# Altium PCB bt-fpc-evt1.PcbDoc
Units mm, origin at the board's own origin, x right, y up, seen from the top; angles counter-clockwise.
Board outline 77.03 x 73.13 mm, 2 copper layers (Top Layer, Bottom Layer), stack 0.109 mm thick; 24 components, 31 nets, 316 pads, 37 vias.
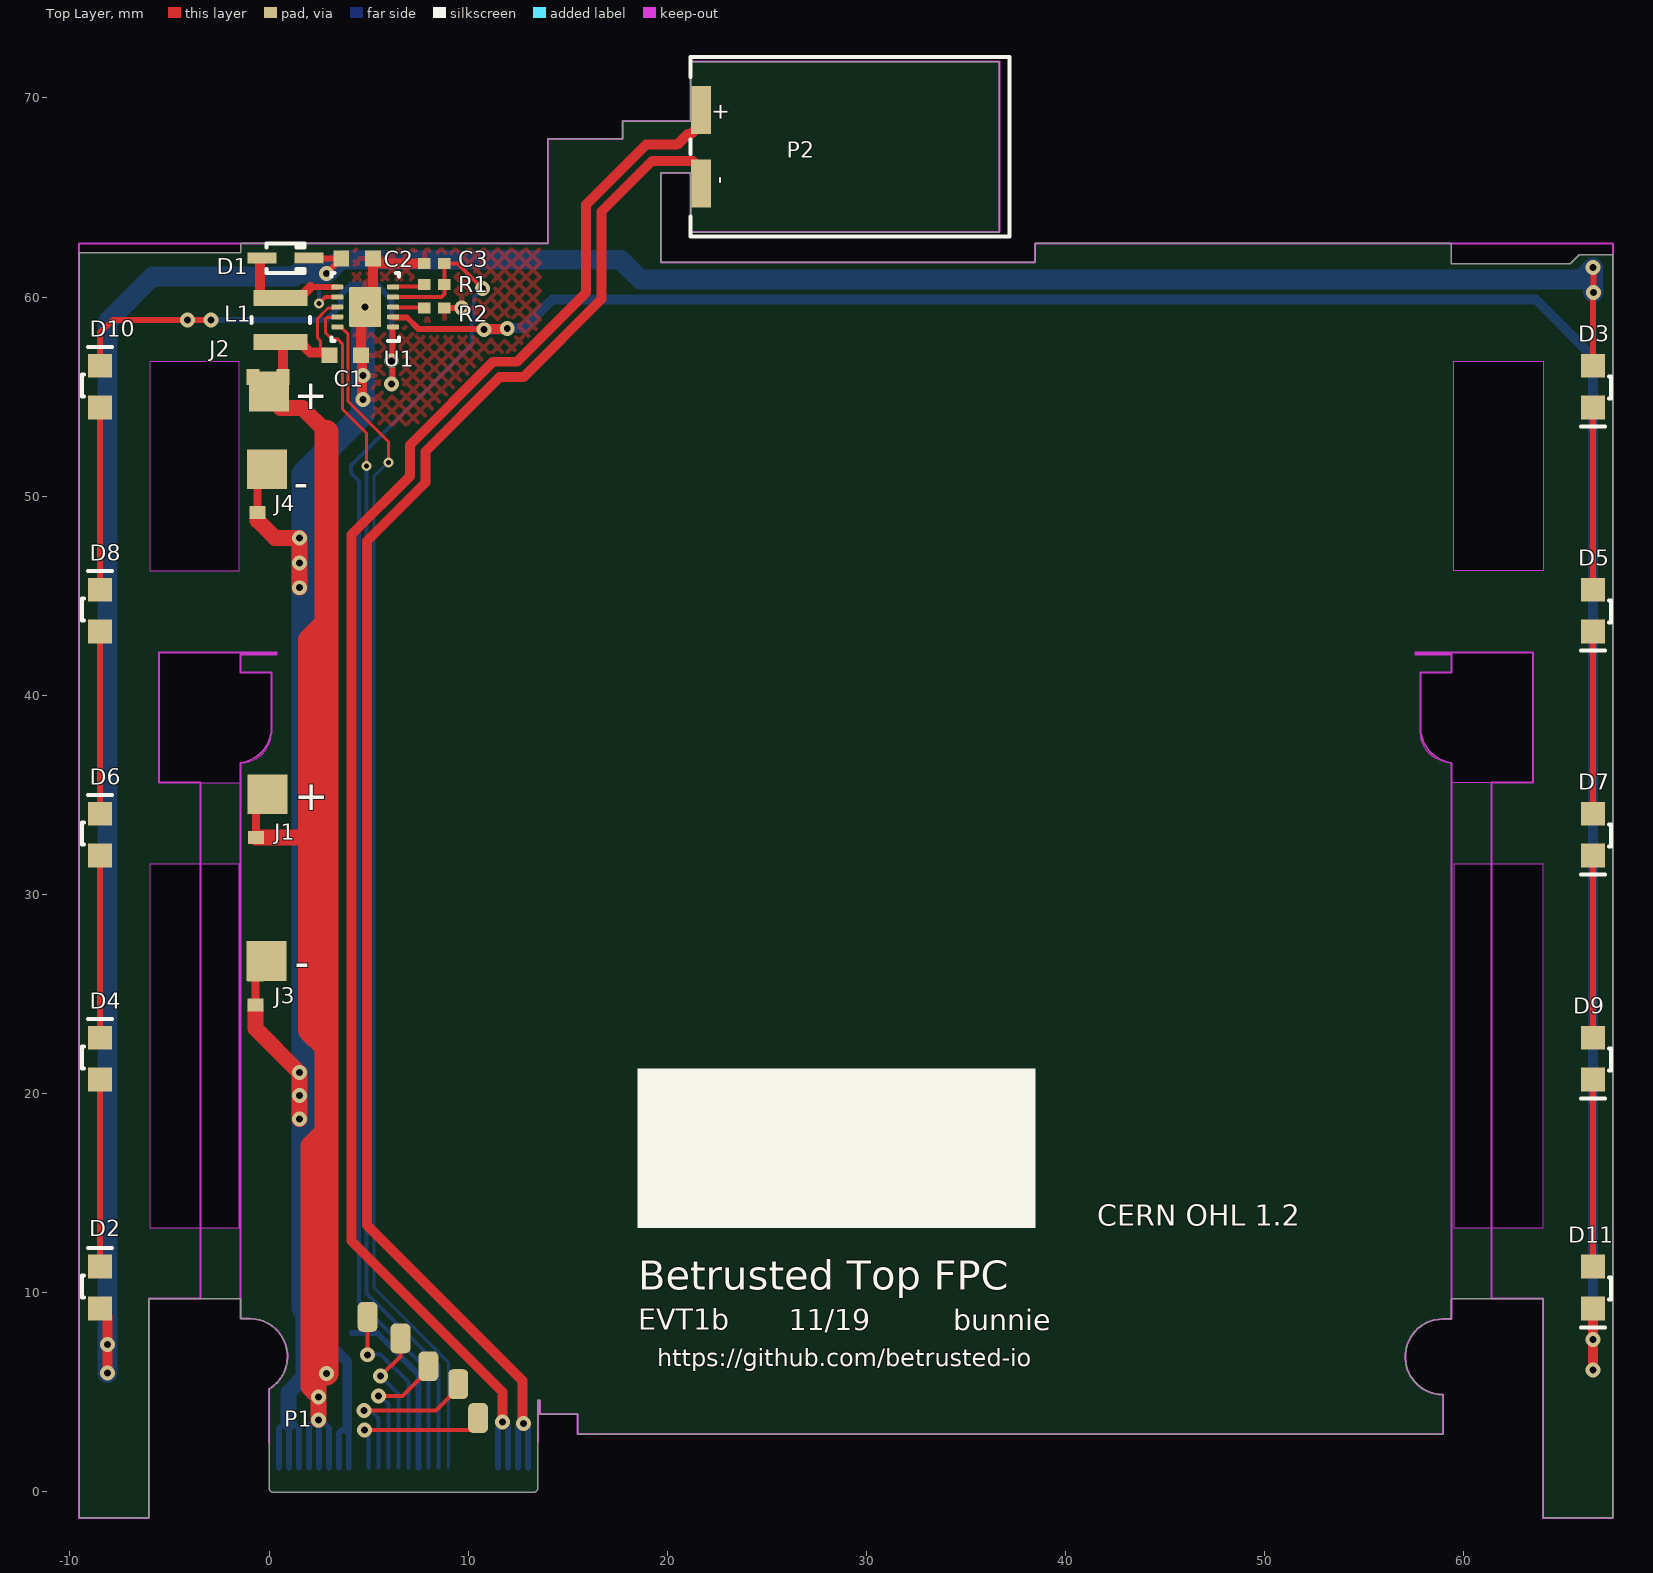
[diagram p0: Top Layer view]
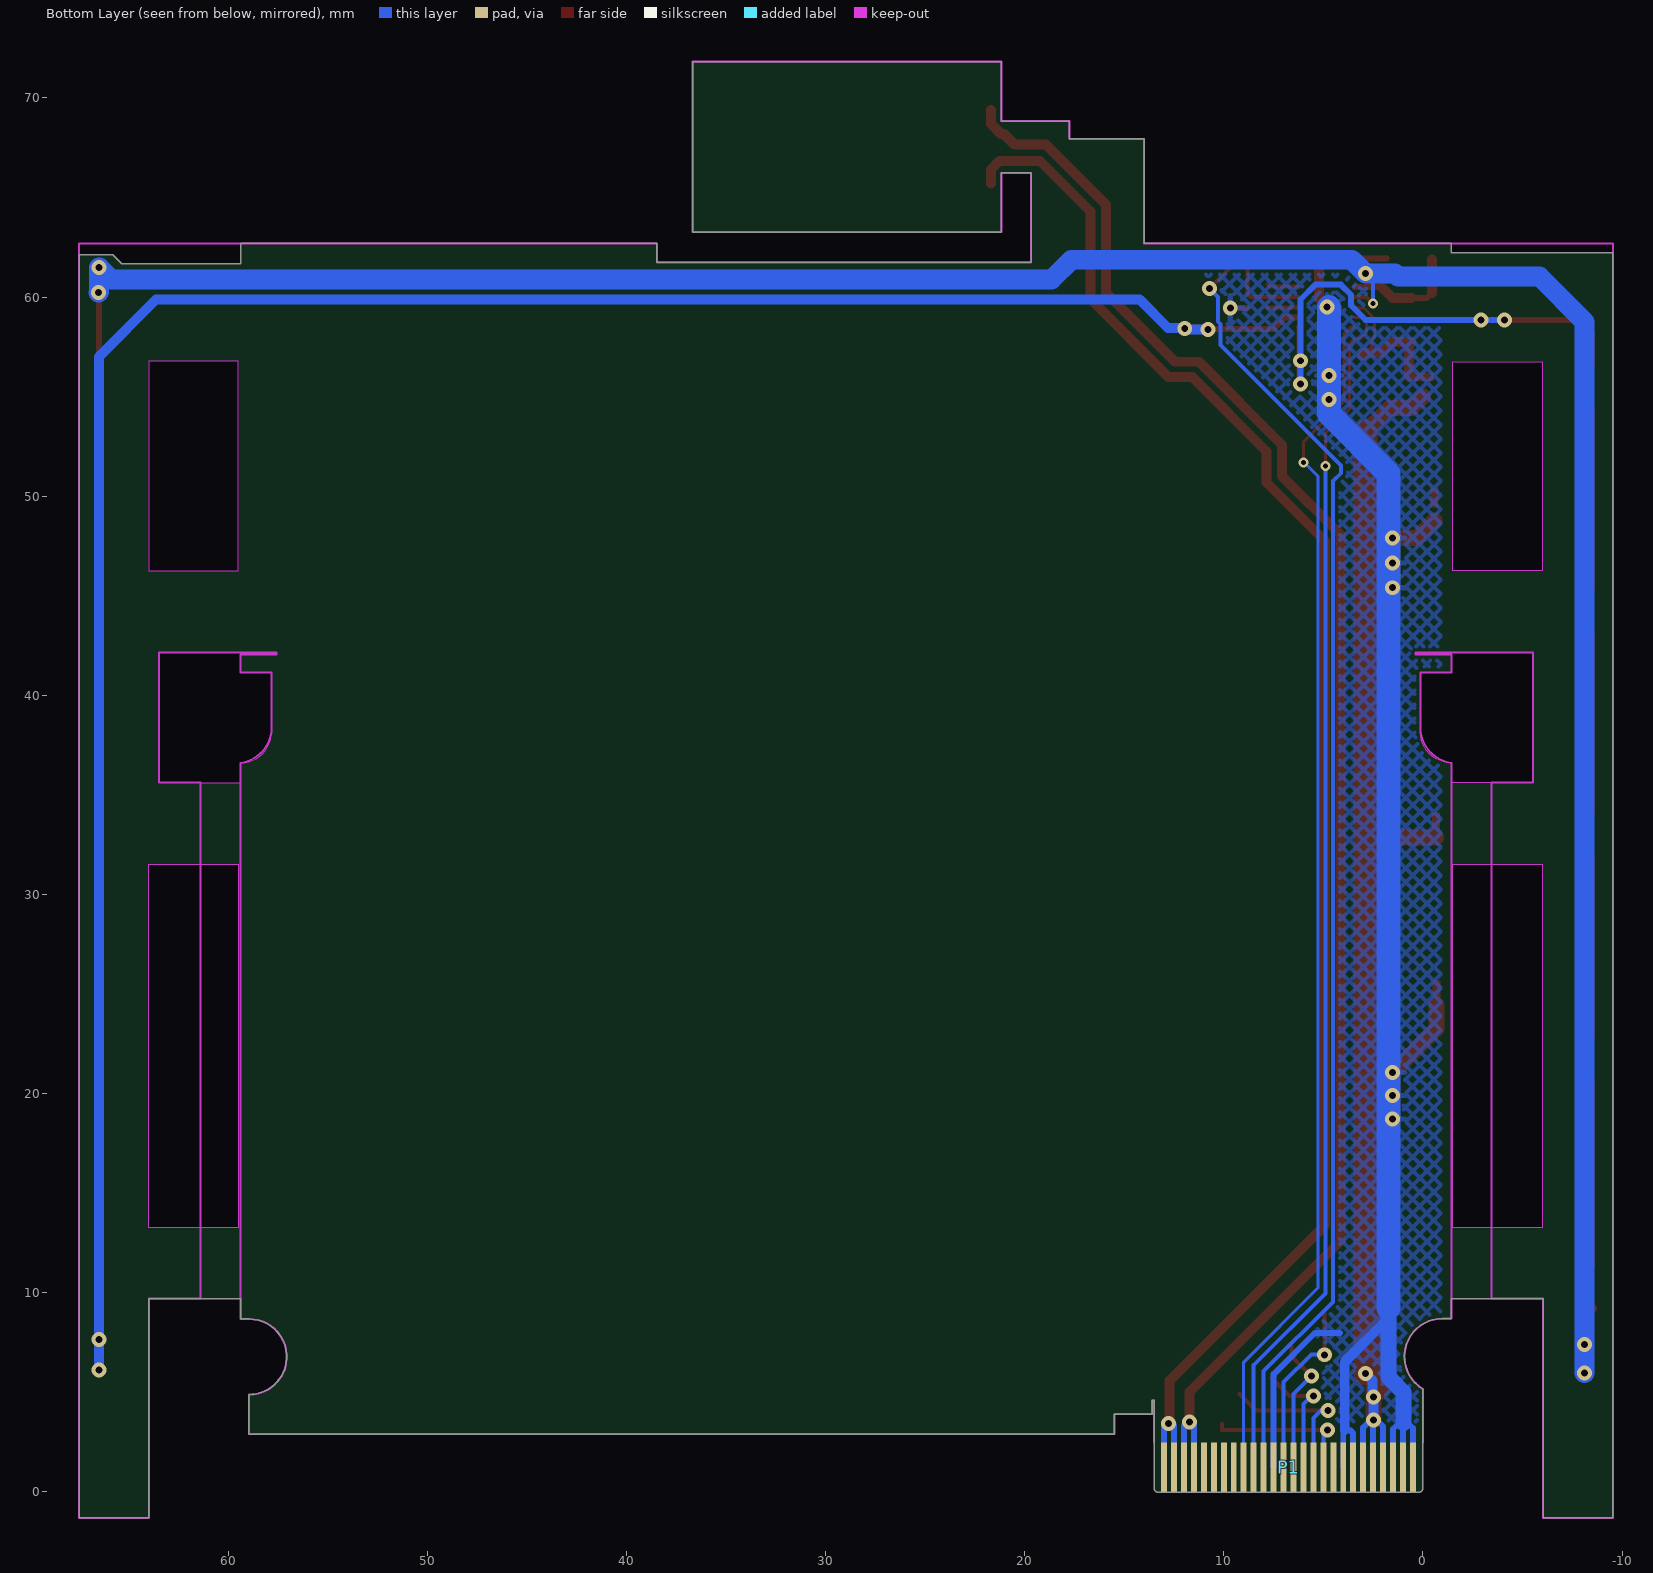
[diagram p1: Bottom Layer view, seen from below]

## Layer stack, top to bottom
Top Coverlay: solder mask 0.0125, FC-001, Dk 4
Top Layer: signal copper 0.02
Dielectric 2: prepreg 0.028, Composite dielectric, Dk 3.952
Dielectric 1: prepreg 0.0125, Composite dielectric, Dk 3.952
Dielectric 3: prepreg 0.028, Composite dielectric, Dk 3.952
Bottom Layer: signal copper 0.02
Bottom Coverlay: solder mask 0.0125, FC-001, Dk 4

## Board outline
-6.042,-1.312 -6.042,9.69 -1.425,9.69 -1.425,8.69 -0.975,8.69 cw(c-0.975,6.79) 0,5.159 0,2.475 0,0.175 ccw(c0.2,0.175) 0.2,-0.025 13.3,-0.025 ccw(c13.3,0.175) 13.5,0.175 13.5,2.475 13.5,4.584 13.6,4.584 13.6,3.89 15.5,3.89 15.5,2.89 58.962,2.89 58.962,4.873 cw(c58.963,6.773) 58.964,8.673 59.375,8.673 59.375,9.69 63.992,9.69 63.992,-1.312 67.492,-1.312 67.492,62.127 65.802,62.127 65.8,62.125 65.35,61.675 59.375,61.675 59.375,62.69 38.475,62.69 38.475,61.74 19.675,61.74 19.675,66.24 21.175,66.24 21.175,63.26 36.675,63.26 36.675,71.82 21.175,71.82 21.175,68.84 17.75,68.84 17.75,67.94 14,67.94 14,62.69 -1.425,62.69 -1.425,62.225 -9.542,62.225 -9.542,-1.312
cut-out: 0.375,42.14 -5.542,42.14 -5.542,35.607 -1.425,35.607 -1.425,36.607 ccw(c-1.425,38.157) 0.125,38.157 0.125,41.14 -1.425,41.14 -1.425,42.04 0.375,42.04
cut-out: 57.575,42.14 63.492,42.14 63.492,35.607 59.375,35.607 59.375,36.607 cw(c59.375,38.157) 57.825,38.157 57.825,41.14 59.375,41.14 59.375,42.04 57.575,42.04
cut-out: 59.5,56.775 64,56.775 64,46.25 59.5,46.25
cut-out: 59.5,13.25 64,13.25 64,31.5 59.5,31.5
cut-out: -6,13.25 -1.5,13.25 -1.5,31.5 -6,31.5
cut-out: -6,56.75 -6,46.25 -1.5,46.25 -1.5,56.75

## Design rules (kind name [scope] priority, off if disabled: settings)
Clearance [All] p1: gap=0.15 ignorepadtopadclearanceinfootprint=FALSE except(0: Arc-Hole Track-Hole SMDPad-Hole THPad-Hole Via-Hole Fill-Hole Poly-Hole Region-Hole Text-Hole)
MinimumSolderMaskSliver [All] p1 off: minsoldermaskwidth=0.254
PolygonConnect [All] p1: connectstyle=Relief reliefconductorwidth=0.254 reliefentries=4 polygonreliefangle="90 Angle" airgapwidth=0.254
RoomDefinition fpc [InComponentClass('fpc')] p1 off: confinementstyle=ConfineIn formatcopy=TRUE lockcomponents=FALSE outline 68.723,0.204 68.125,0.204 68.125,17.73 68.723,17.73
RoutingVias [All] p1: holewidth=0.35 width=0.8 viastyle="Through Hole" minholewidth=0.25 minwidth=0.5 maxholewidth=0.7 maxwidth=1
SilkToSilkClearance [All] p1 off: silktosilkclearance=0.254
SilkToSolderMaskClearance [IsPad] p1 off: minsilkscreentomaskgap=0.254 clearancetoexposedcopper=TRUE
SolderMaskExpansion [All] p1: expansion=0.102
Width [All] p1: maxlimit=5 minlimit=0.15 preferedwidth=0.15
27 further rules are at their usual default settings.

## Components (designator, comment, footprint, x,y, rotation, side; value= is the part's Value field where it differs from the comment)
C1 "2.2uF, 25V, X5R" B_CAP0603 3.825,57.075 r0 top
C2 "2.2uF, 25V, X5R" B_CAP0603 4.425,61.925 r0 top
C3 "0.1uF, 10V, X5R" B_CAP0402 8.3,61.675 r180 top
D1 "NSR0530HT1G" SOD-323 0.825,61.95 r0 top
D2 "white SML-R1" ROHM_SML-R1 -8.5,10.25 r0 top
D3 "white SML-R1" ROHM_SML-R1 66.5,55.5 r180 top
D4 "white SML-R1" ROHM_SML-R1 -8.5,21.75 r0 top
D5 "white SML-R1" ROHM_SML-R1 66.5,44.25 r180 top
D6 "white SML-R1" ROHM_SML-R1 -8.5,33 r0 top
D7 "white SML-R1" ROHM_SML-R1 66.5,33 r180 top
D8 "white SML-R1" ROHM_SML-R1 -8.5,44.25 r0 top
D9 "white SML-R1" ROHM_SML-R1 66.5,21.75 r180 top
D10 "white SML-R1" ROHM_SML-R1 -8.5,55.5 r0 top
D11 "white SML-R1" ROHM_SML-R1 66.5,10.25 r180 top
J1 "power tap (DNP)" RESTAP-0603 -0.65,33.6 r90 top
J2 "power tap (DNP)" RESTAP-0603 -0.05,55.975 r180 top
J3 "power tap (DNP)" RESTAP-0603 -0.675,25.2 r90 top
J4 "power tap (DNP)" RESTAP-0603 -0.575,49.937 r270 top
L1 "10uH 0.81A 3030" B_IND3030_MUR 0.575,58.85 r90 top
P1 "26-pin FPC" HRS_FH34SRJ-26S-FPC 6.75,1.225 r0 top
P2 "CMS-16093-076SP-67" CUI_CMS-16093-076SP-67 21.7,67.55 r270 top
R1 "47k, 1%" B_RES0402 8.3,60.625 r180 top
R2 "47k, 1%" B_RES0402 8.3,59.45 r0 top
U1 "LM3509SDE/NOPB" DSC0010A_V 4.825,59.5 r180 top

## Footprints (in the part's own frame and the unit in brackets; to place one, negate y for a bottom-side part, rotate by r counter-clockwise, add the part's x,y. Pads: shape width x height; smd on the part's side, far side on the other; paste and mask are expansions set on the pad)
B_CAP0402 [mm] "Capacitor 0402"
  rect 0.63x0.55 smd mask+0.07: 1(-0.5,0) 2(0.5,0)
  body extent -0.53,-0.27 0.53,0.28, height 0.4
B_CAP0603 [mm] "Capacitor 0603"
  rect 0.8x0.8 smd mask+0.07: 1(-0.8,0) 2(0.8,0)
  body extent -0.85,-0.45 0.85,0.45, height 0.9
B_IND3030_MUR [mm] "Chip Inductor, 2-Leads, Body 3.00x3.00mm, IPC Medium Density"
  rect 0.8x2.7 smd: 1(-1.1,0) 2(1.1,0)
  silkscreen extent -0.15,-1.47 0.15,1.47, body extent -1.5,-1.5 1.5,1.5, height 1.1
B_RES0402 [mm] "Resistor 0402"
  rect 0.63x0.55 smd mask+0.07: 1(-0.5,0) 2(0.5,0)
  body extent -0.53,-0.28 0.53,0.28, height 0.4
CUI_CMS-16093-076SP-67 [mm] "CUI IP67 rated speaker"
  rect 2.4x1 smd mask+0.1: 1(1.85,0) 2(-1.85,0)
  silkscreen extent -4.5,-0.53 4.5,15.48, body extent -4.5,-0.52 4.5,15.48, height 3.1
DSC0010A_V [mm] "SON, 10-Leads, Body 3x3mm, Pitch 0.5mm, Thermal Pad 2.0x1.6mm, TI Recommended"
  rrect40% 0.6x0.25 smd mask+0.05: 1(-1.4,1) 2(-1.4,0.5) 3(-1.4,0) 4(-1.4,-0.5) 5(-1.4,-1) 6(1.4,-1) 7(1.4,-0.5) 8(1.4,0) 9(1.4,0.5) 10(1.4,1)
  rrect6% 1.6x2 smd paste-0.825 mask+0.05: 11(0,0)
  silkscreen extent -1.7,-1.7 1.7,1.7, body extent -1.55,-1.55 1.55,1.55, height 0.8
HRS_FH34SRJ-26S-FPC [mm] "FPC pattern for mating to FH34SRJ-26S"
  rect 0.3x2.5 smd far side mask+0.07: 1(-6.25,0) 2(-5.75,0) 3(-5.25,0) 4(-4.75,0) 5(-4.25,0) 6(-3.75,0) 7(-3.25,0) 8(-2.75,0) 9(-2.25,0) 10(-1.75,0) 11(-1.25,0) 12(-0.75,0) 13(-0.25,0) 14(0.25,0) 15(0.75,0) 16(1.25,0) 17(1.75,0) 18(2.25,0) 19(2.75,0) 20(3.25,0) 21(3.75,0) 22(4.25,0) 23(4.75,0) 24(5.25,0) 25(5.75,0) 26(6.25,0)
RESTAP-0603 [mm] "0603 Power tap, cut-trace style"
  rect 0.65x0.8 smd: 1(-0.75,0) 1(0.75,0)
  Top Layer region: -0.5,-0.2 0.5,-0.2 0.5,0.2 -0.5,0.2
  body extent -0.8,-0.4 0.8,0.4, height 0.8
ROHM_SML-R1 [mm] "PICOLED-side firing, 0.2mm thick"
  rect 1.2x1.2 smd mask+0.07: 1(0,-1.05) 2(0,1.05)
  silkscreen extent -0.9,-0.5 0.6,2, body extent -0.75,-0.8 0.35,0.8, height 0.2
SOD-323 [mm] "SOD-323/SC-76; 2 Leads; Body 1.7 x 1.3 mm, (LxW)"
  rect 1.45x0.55 smd: 1(1.175,0) 2(-1.175,0)
  silkscreen extent -0.95,-0.75 0.95,0.75

## Part data
C1 C2: library part "Cap Semi", "Capacitor (Semiconductor SIM Model)", MPN=GRM188R61E225MA12D, MYPN=C-225-25-X5R-0603, VENDOR=Murata
C3: library part "Cap Semi", "Capacitor (Semiconductor SIM Model)", MPN=CL05A104KP5NNNC, MYPN=C-104-10-X5R-0402, VENDOR=Samsung
D1: library part "Diode 11DQ03", "Schottky Rectifier", ComponentLink1Description="Manufacturer Link", ComponentLink1URL=http://www.irf.com/, ComponentLink2Description=Datasheet, ComponentLink2URL=http://www.irf.com/product-info/datasheets/data/11dq03.pdf, MPN=NSR0530HT1G, MYPN=D-NSR0530HT1G, VENDOR="On Semi"
D2 D3 D4 D5 D6 D7 D8 D9 D10 D11: library part LED2, "Red LED", MPN=SMLR13WBDW, LatestRevisionDate=17-Jul-2002, LatestRevisionNote="Re-released for DXP Platform.", MYPN=D-LED-WHT-SIDE-0.2mm, PackageReference=3.2X1.6X1.1, PackageVersion=Feb-2002, Published=8-Jun-2000, Publisher="Altium Limited", VENDOR=ROHM
J1 J2 J3 J4: library part CON1, "Connector", MPN=DNP, MYPN=J-TP-PWRTAP-0603, VENDOR=DNP
L1: library part "Inductor Iron", "Magnetic-Core Inductor", MPN=LQH3NPN100MJRL, MYPN=L-LQH3NPN100MJRL, VENDOR=Murata
P1: library part FPC-26, "26 Pin FPC footprint", MPN=DNP, MYPN=DNP, System=Connector, VENDOR="FPC pattern"
P2: library part "Header 2", LatestRevisionDate=17-Jul-2002, LatestRevisionNote="Re-released for DXP Platform.", MPN=CMS-16093-076SP-67, MYPN=SPK-CMS-16093-076SP-67, Publisher="Altium Limited", VENDOR=CUI
R1 R2: library part Res1, "Resistor", MPN=ANY, MYPN=R-473-1P-1_16W-0402, VENDOR=ANY
U1: MPN=LM3509SDE/NOPB, MYPN=U-LM3509SDE/NOPB, VENDOR=TI

## Free pads (board coordinates)
  rrect50% 1x1.5 smd mask+0.07: 0(4.95,8.78) 0(6.6,7.7) 0(8,6.3) 0(9.5,5.4) 0(10.5,3.7)
  rect 2.54x0.051 on Top Overlay: 1(44.339,17.76) 1(44.339,17.811) 1(44.339,17.861) 1(44.339,17.912) 1(44.339,17.963) 1(44.339,18.014) 1(44.339,18.065) 1(44.339,18.115) 1(44.339,18.166) 1(44.339,18.217) 1(44.339,18.268) 1(44.339,18.319) 1(44.441,18.522) 1(48.759,18.522) 1(48.861,17.76) 1(48.861,18.166) 1(48.861,18.319) 1(48.861,17.709) 1(48.861,17.811) 1(48.861,17.861) 1(48.861,17.912) 1(48.861,18.115) 1(48.861,18.217) 1(48.861,18.268)
  rect 2.591x0.051 on Top Overlay: 1(44.365,17.607) 1(44.365,18.369) 1(44.365,17.658) 1(44.365,17.709) 1(44.365,18.42) 1(44.416,17.557) 1(48.784,17.557) 1(48.835,17.607) 1(48.835,17.658) 1(48.835,18.369) 1(48.835,18.42) 1(48.835,18.471)
  rect 2.642x0.051 on Top Overlay: 1(44.39,18.471)
  rect 0.102x0.051 on Top Overlay: 1(44.441,20.808) 1(45.508,15.575) 1(47.692,15.575) 1(48.759,20.808)
  rect 0.152x0.051 on Top Overlay: 1(44.466,15.271) 1(48.734,15.271)
  rect 0.254x0.051 on Top Overlay: 1(44.466,15.321) 1(44.466,20.757) 1(45.482,15.626) 1(47.718,15.626) 1(48.734,15.321) 1(48.734,20.757)
  rect 0.356x0.051 on Top Overlay: 1(44.466,20.706) 1(45.432,15.677) 1(47.768,15.677) 1(48.734,20.706) 1(48.734,15.372)
  rect 0.406x0.051 on Top Overlay: 1(44.492,15.372)
  rect 0.508x0.051 on Top Overlay: 1(44.492,15.423) 1(44.492,20.655) 1(48.708,15.423)
  rect 0.61x0.051 on Top Overlay: 1(44.492,20.605) 1(48.708,15.474) 1(48.708,20.605)
  rect 0.66x0.051 on Top Overlay: 1(44.517,15.474)
  rect 0.762x0.051 on Top Overlay: 1(44.517,15.525) 1(44.517,20.554) 1(48.683,15.525)
  rect 0.864x0.051 on Top Overlay: 1(44.517,15.575) 1(44.517,20.503) 1(46.6,21.57) 1(48.683,15.575) 1(48.683,20.503)
  rect 0.965x0.051 on Top Overlay: 1(44.517,20.452) 1(46.6,21.519) 1(46.6,21.417) 1(46.6,21.468) 1(48.683,20.452)
  rect 1.118x0.051 on Top Overlay: 1(44.543,15.677) 1(44.543,20.401) 1(46.625,21.062) 1(48.657,15.677) 1(48.657,20.401)
  rect 1.219x0.051 on Top Overlay: 1(44.543,20.351) 1(46.625,20.808) 1(48.657,20.351)
  rect 1.016x0.051 on Top Overlay: 1(44.543,15.626) 1(46.625,21.367) 1(48.657,15.626)
  rect 2.337x0.051 on Top Overlay: 1(44.543,17.506) 1(47.895,19.03) 1(48.657,17.506)
  rect 2.286x0.051 on Top Overlay: 1(44.619,18.573) 1(45.33,19.03) 1(48.632,18.573)
  rect 2.134x0.051 on Top Overlay: 1(44.695,17.455) 1(45.203,18.979) 1(47.997,18.979) 1(48.505,17.455)
  rect 1.93x0.051 on Top Overlay: 1(44.746,15.88) 1(45,17.252) 1(45.051,17.201) 1(45.051,18.877) 1(45.152,16.896) 1(45.152,16.947) 1(48.048,16.896) 1(48.048,16.947) 1(48.149,17.201) 1(48.149,18.877) 1(48.454,15.88)
  rect 1.829x0.051 on Top Overlay: 1(44.746,15.829) 1(44.847,16.083) 1(44.898,16.134) 1(44.898,16.185) 1(44.898,18.674) 1(44.949,16.236) 1(44.949,17.303) 1(44.949,17.353) 1(44.949,18.725) 1(45,18.776) 1(45.152,16.744) 1(45.152,16.795) 1(48.048,16.744) 1(48.048,16.795) 1(48.251,17.303) 1(48.251,18.725) 1(48.302,16.185) 1(48.302,17.353) 1(48.302,18.674) 1(48.353,16.083) 1(48.454,15.829)
  rect 2.032x0.051 on Top Overlay: 1(44.746,18.623) 1(45.152,16.998) 1(45.152,17.049) 1(45.152,17.099) 1(48.048,16.998) 1(48.048,17.049) 1(48.099,17.099) 1(48.454,18.623)
  rect 1.778x0.051 on Top Overlay: 1(44.771,15.779) 1(44.974,16.287) 1(44.974,16.337) 1(45.025,16.388) 1(45.076,16.49) 1(48.124,16.49) 1(48.175,16.388) 1(48.226,16.287) 1(48.226,16.337) 1(48.276,16.236) 1(48.429,15.779)
  rect 1.88x0.051 on Top Overlay: 1(44.771,15.931) 1(44.822,15.982) 1(44.822,16.033) 1(44.873,17.404) 1(45.025,18.827) 1(45.178,16.845) 1(48.073,16.845) 1(48.175,18.827) 1(48.226,17.252) 1(48.226,18.776) 1(48.327,17.404) 1(48.327,16.134) 1(48.378,16.033) 1(48.429,15.931) 1(48.429,15.982)
  rect 1.727x0.051 on Top Overlay: 1(44.797,15.728) 1(45.051,16.439) 1(45.101,16.541) 1(45.152,16.591) 1(45.152,16.642) 1(45.152,16.693) 1(46.625,20.503) 1(48.048,16.642) 1(48.048,16.693) 1(48.099,16.541) 1(48.149,16.439)
  rect 1.981x0.051 on Top Overlay: 1(45.076,17.15) 1(45.127,18.928) 1(46.6,20.452) 1(48.073,18.928) 1(48.124,17.15)
  rect 4.724x0.051 on Top Overlay: 1(46.6,19.233) 1(46.6,19.182) 1(46.6,19.538)
  rect 4.623x0.051 on Top Overlay: 1(46.6,19.284) 1(46.6,19.335) 1(46.6,19.385) 1(46.6,19.436)
  rect 4.928x0.051 on Top Overlay: 1(46.6,19.69)
  rect 5.334x0.051 on Top Overlay: 1(46.6,19.995) 1(46.6,19.944)
  rect 5.436x0.051 on Top Overlay: 1(46.6,20.046) 1(46.6,20.3)
  rect 2.184x0.051 on Top Overlay: 1(46.6,20.401)
  rect 1.27x0.051 on Top Overlay: 1(46.6,20.757) 1(46.6,20.605) 1(46.6,20.655) 1(46.6,20.706)
  rect 1.067x0.051 on Top Overlay: 1(46.6,21.113) 1(46.6,21.163) 1(46.6,21.214) 1(46.6,21.265) 1(46.6,21.316)
  rect 4.826x0.051 on Top Overlay: 1(46.6,19.081) 1(46.6,19.131) 1(46.6,19.589)
  rect 5.029x0.051 on Top Overlay: 1(46.6,19.741)
  rect 5.131x0.051 on Top Overlay: 1(46.6,19.843)
  rect 5.232x0.051 on Top Overlay: 1(46.6,19.893)
  rect 5.537x0.051 on Top Overlay: 1(46.6,20.097) 1(46.6,20.147) 1(46.6,20.249)
  rect 5.639x0.051 on Top Overlay: 1(46.6,20.198)
  rect 2.489x0.051 on Top Overlay: 1(46.6,20.351) 1(48.886,17.963) 1(48.886,18.014) 1(48.886,18.065)
  rect 1.473x0.051 on Top Overlay: 1(46.6,20.554)
  rect 1.168x0.051 on Top Overlay: 1(46.6,20.859) 1(46.6,20.909) 1(46.6,20.96) 1(46.6,21.011)
  rect 4.877x0.051 on Top Overlay: 1(46.625,19.639)
  rect 4.674x0.051 on Top Overlay: 1(46.625,19.487)
  rect 5.08x0.051 on Top Overlay: 1(46.625,19.792)
  rect 1.676x0.051 on Top Overlay: 1(48.073,16.591) 1(48.429,15.728)
  rect 0.711x0.051 on Top Overlay: 1(48.708,20.554)
  rect 0.457x0.051 on Top Overlay: 1(48.734,20.655)
  rect 2x2 smd mask+0.07: 2(-0.125,26.65) 3(-0.075,35.025) 4(-0.1,51.35) 4(0,55.25)

## Via types
v1: diameter 0.75, hole 0.35, Top Layer to Bottom Layer, tented both sides, 34 vias
v2: diameter 0.5, hole 0.25, Top Layer to Bottom Layer, tented both sides, 3 vias

## Nets (pads, with @x,y where several pads share a name; then routed paths per layer and width w, separated by ;. In a path a pad name is that pad's centre, name@x,y a point inside that pad or via, vN(x,y) a via of type N, cw(c..) or ccw(c..) an arc to the next point about the centre after c; other vN are vias at no path point)
GND: C1.2 C2.2 C3.2 J3.1 J4.1 P1.1 P1.2 P1.3 P1.7 P1.8 P1.15 pad.2 pad.4@-0.1,51.35 R2.2 U1.11 | length 107
  Top Layer w0.3: R2.2 v1(9.675,59.45) v1@9.7,59.475
  Top Layer w0.5: v1(4.725,54.85) 4.677,54.898 4.677,57.023 C1.2 4.625,59.3 v1(4.825,59.5) 5.225,59.9 C2.2 5.475,61.675 C3.2
  Top Layer w0.8: J3.1@-0.675,24.45 -0.675,23.25 v1(1.525,21.05) v1(1.525,19.887) v1(1.525,18.725) ; -0.575,48.775 0.3,47.9 v1(1.525,47.9) v1(1.525,46.65) v1(1.525,45.4)
  Bottom Layer w0.3: P1.1 0.5,3.2 0.75,3.45 0.975,3.45 ; P1.2 1,3.425 0.975,3.45 ; P1.3 1.5,3.15 1.2,3.45 0.975,3.45 ; P1.7 3.5,2.925 3.676,3.101 3.924,3.101 4,3.025 P1.8 ; 4.175,7.968 5.432,7.968 7.5,5.9 P1.15
  Bottom Layer w0.5: 1.725,9.225 1.725,8.725 3.924,6.526 3.924,3.101
  Bottom Layer w0.8: 0.975,3.45 0.975,5 1.725,5.75 1.725,8.725
  Bottom Layer w1.2: 1.725,9.225 1.725,51.125 4.725,54.125 v1(4.725,54.85) v1(4.725,56.05) v1@4.725,59.5
GPIO0: P1.10 pad.0@10.5,3.7 | length 7.6
  Top Layer w0.2: v1(4.8,3.1) 10.1,3.1 pad.0@10.1,3.4
  Bottom Layer w0.2: v1(4.8,3.1) 5,2.9 P1.10
GPIO1: P1.11 pad.0@9.5,5.4 | length 8.2
  Top Layer w0.2: v1(4.759,4.084) 8.384,4.084 pad.0@9.2,4.9
  Bottom Layer w0.2: v1(4.759,4.084) 5.116,4.084 5.5,3.7 P1.11
GPIO2: P1.12 pad.0@8,6.3 | length 6.3
  Top Layer w0.2: v1(5.5,4.8) 6.7,4.8 pad.0@7.6,5.7
  Bottom Layer w0.2: v1(5.5,4.8) 5.6,4.8 6,4.4 P1.12
GPIO3: P1.13 pad.0@6.6,7.7 | length 6.9
  Top Layer w0.2: v1(5.6,5.8) 6.6,6.8 pad.0@6.6,7.3
  Bottom Layer w0.2: v1(5.6,5.8) 6.5,4.9 P1.13
GPIO4: P1.14 pad.0@4.95,8.78 | length 8.9
  Top Layer w0.2: v1(4.95,6.875) pad.0@4.95,8.95
  Bottom Layer w0.2: v1@5,6.9 5.6,6.9 7,5.5 P1.14
I2C0_SCL: P1.18 U1.10 | length 60.3
  Top Layer w0.15: U1.10 3.6,58.5 3.975,58.125 3.975,54.751 6,52.726 v2(6,51.7)
  Bottom Layer w0.15: v2@5.98,51.72 5.275,51.014 5.275,10.225 9,6.5 P1.18
I2C0_SDA: P1.17 U1.9 | length 60.8
  Top Layer w0.15: U1.9 3.4,58.975 2.913,58.975 2.825,58.887 2.825,58.225 3.15,57.9 3.425,57.9 3.675,57.65 3.675,54.375 4.9,53.15 v2(4.9,51.525)
  Bottom Layer w0.2: v2(4.9,51.525) 4.9,9.95 8.5,6.35 P1.17
MAINFB: D10.2 U1.1 | length 26.3
  Top Layer w0.3: D10.2 -8.5,58.2 -7.85,58.85 v1(-4.1,58.85) v1(-2.925,58.85) ; v1(6.15,55.625) 6.188,55.662 6.188,58.475 6.212,58.5 U1.1
  Bottom Layer w0.3: v1(-4.1,58.85) v1(-2.925,58.85) 2.875,58.85 3.6,59.575 3.6,60.1 4.125,60.625 5.4,60.625 6.15,59.875 v1(6.15,56.8) v1(6.15,55.625)
NetD2_2: D2.2 D4.1 | length 9.4
  Top Layer w0.3: D2.2 D4.1
NetD3_2: D3.2 D5.1 | length 9.1
  Top Layer w0.3: D5.1 D3.2
NetD4_2: D4.2 D6.1 | length 9.1
  Top Layer w0.3: D4.2 D6.1
NetD5_2: D5.2 D7.1 | length 9.1
  Top Layer w0.3: D7.1 D5.2
NetD6_2: D6.2 D8.1 | length 9.1
  Top Layer w0.3: D6.2 D8.1
NetD7_2: D7.2 D9.1 | length 9.1
  Top Layer w0.3: D9.1 D7.2
NetD8_2: D8.2 D10.1 | length 9.1
  Top Layer w0.3: D8.2 D10.1
NetD9_2: D9.2 D11.1 | length 9.4
  Top Layer w0.3: D11.1 D9.2
NetR1_2: R1.2 U1.5 | length 1.6
  Top Layer w0.2: U1.5 6.25,60.525 7.7,60.525 R1.2
P1.8V: C3.1 P1.16 R1.1 U1.4 | length 70.2
  Top Layer w0.2: U1.4 8.65,60 8.8,60.15 R1.1 C3.1 8.812,61.687 9.463,61.687 v1(10.725,60.425)
  Bottom Layer w0.2: P1.16 8,6.05 4.525,9.525 4.525,49.525 4.525,50.75 4.125,51.15 4.125,51.55 10.175,57.6 10.175,58.634 10.3,58.759 10.3,60 v1(10.725,60.425)
P3.3V_A: P1.9
PACK_P: C1.1 J1.1 J2.1 L1.1 P1.4 P1.5 P1.6 pad.3 pad.4@0,55.25 U1.8 | length 110.9
  Top Layer w0.15: 2.462,57.225 2.487,57.225 2.575,57.313 2.575,57.8 2.425,57.95 2.425,58.911 2.964,59.45 3.375,59.45 U1.8
  Top Layer w0.5: J2.1@0.7,55.975 0.7,57.625 L1.1 1.525,57.75 2.05,57.225 2.462,57.225 ; 2.487,57.225 2.875,57.225 C1.1
  Top Layer w0.8: J1.1@-0.65,32.85 2.05,32.85 2.8,32.85 2.875,32.925 ; pad.4@0,55 0.575,54.425 1.675,54.425 2.875,53.225 ; v1(2.475,3.6) v1(2.475,4.75) ; v1(2.875,5.925) 2.475,5.525 v1(2.475,4.75) ; 2.875,18.3 1.975,17.4 1.975,5.25 v1(2.475,4.75)
  Top Layer w1.2: v1(2.875,5.925) 2.875,18.3 2.875,22.35 ; 2.875,53.225 2.875,43.6 ; 2.875,22.35 2.05,23.175 2.05,32.85 2.05,42.775 2.875,43.6 ; 2.875,22.35 2.875,32.925 2.875,43.6
  Bottom Layer w0.3: P1.4 2,3.275 2.325,3.6 v1(2.475,3.6) v1@2.625,3.6 ; P1.5 2.5,3.475 v1@2.625,3.6 ; P1.6 3,3.225 v1@2.625,3.6
  Bottom Layer w0.5: v1(2.475,3.6) v1(2.475,4.75) 2.523,4.798 2.523,5.573 v1(2.875,5.925)
SET: R2.1 U1.3 | length 1.6
  Top Layer w0.2: U1.3 6.25,59.475 7.775,59.475 R2.1
SPK+: P1.23 P1.24 P2.2 | length 82.9
  Top Layer w0.5: v1(11.725,3.5) 11.725,5 4.142,12.583 4.142,48.067 7.075,51 7.075,52.575 11.25,56.75 12.45,56.75 15.925,60.225 15.925,64.65 18.925,67.65 20.5,67.65 21.05,68.2 21.2,68.2 21.7,68.7 P2.2
  Bottom Layer w0.3: P1.23 11.5,3.35 11.65,3.5 v1(11.725,3.5) 11.824,3.5 12,3.324 P1.24
SPK-: P1.25 P1.26 P2.1 | length 81.5
  Top Layer w0.5: v1(12.775,3.425) 12.727,3.473 12.727,5.573 4.917,13.383 4.917,47.746 7.85,50.679 7.85,52.25 11.575,55.975 12.771,55.975 16.7,59.904 16.7,64.3 19.225,66.825 21.275,66.825 21.7,66.4 P2.1
  Bottom Layer w0.3: P1.25 12.5,3.35 12.65,3.5 12.824,3.5 13,3.324 P1.26
SUBFB: D11.2 U1.2 | length 117.5
  Top Layer w0.3: U1.2 6.25,58.975 6.925,58.975 7.5,58.4 v1@10.8,58.4
  Top Layer w0.5: v1(10.8,58.375) 10.818,58.393 11.943,58.393 v1(11.961,58.411) ; v1(66.5,6.1) v1(66.5,7.65) D11.2
  Bottom Layer w0.5: v1(10.8,58.375) 11.925,58.375 v1(11.961,58.411) 11.998,58.448 12.798,58.448 14.225,59.875 63.625,59.875 66.5,57 v1(66.5,7.65) v1(66.5,6.1)
SW: D1.2 L1.2 U1.6 | length 6
  Top Layer w0.3: D1.2@-0.525,61.95 D1.2@-0.45,61.875 ; L1.2@-0.45,60.2 -0.2,59.95 L1.2 ; 2.075,60.5 U1.6
  Top Layer w0.5: L1.2@-0.45,60.2 D1.2@-0.45,61.875 ; L1.2 1.525,59.95 2.075,60.5
UP5K_RGB0: P1.20
UP5K_RGB1: P1.21
UP5K_RGB2: P1.22
VLED: C2.1 D1.1 D2.1 D3.1 U1.7 | length 144.5
  Top Layer w0.2: v2(2.5,59.675) 2.825,60 U1.7
  Top Layer w0.3: D1.1@1.825,61.95 1.837,61.938 3.612,61.938 C2.1 v1(2.875,61.175) ; D3.1 v1@66.5,60.225 ; v1(66.5,61.475) 66.512,61.463 66.512,60.238 v1(66.525,60.225)
  Top Layer w0.5: D2.1 -8.125,8.825 v1(-8.125,5.95)
  Bottom Layer w0.2: 2.325,61.175 2.5,61 v2(2.5,59.675)
  Bottom Layer w1: v1(-8.125,5.95) -8.125,58.75 -5.85,61.025 1.25,61.025 1.4,61.175 2.325,61.175 v1(2.875,61.175) 3.575,61.875 17.65,61.875 18.65,60.875 65.875,60.875 66.475,61.475 v1(66.5,61.475) 66.5,60.25 v1(66.525,60.225)
  other v1: -8.125,7.388
VSYS_T: P1.19

## Polygon pours and split planes (outlines as drawn)
GND on Top Layer "GND_L01_P002" (hatched 45Degree grid 0.5 track 0.2, remove dead copper, pour order 2): 4.3,61.225 3.55,60.475 3.55,55.2 5.15,53.6 9.85,53.6 13.6,57.35 13.6,62.5 4.325,62.5 4.3,62.475
GND on Bottom Layer "GND_L02_P000" (hatched 45Degree grid 0.5 track 0.2, remove dead copper, pour order 0): -0.025,3.525 5,3.525 5.3,3.825 5.3,51.05 11.075,56.825 11.075,61.925 -0.675,61.925 -0.875,61.725 -0.875,4.25 -0.1,3.475

## Keep-outs
Keep-Out Layer:
  lines w0.1: 0,2.475 0,5.159 ccw(c-0.975,6.79) -0.975,8.69 -1.425,8.69 -1.425,36.607 ccw(c-1.675,38.39) 0.125,38.39 0.125,41.14 -1.425,41.14 -1.425,42.04 0.375,42.04 0.375,42.14 -5.542,42.14 -5.542,35.607 -3.452,35.607 -3.452,9.69 -6.042,9.69 -6.042,-1.312 -9.542,-1.312 -9.542,62.69 14,62.69 14,67.94 17.75,67.94 17.75,68.84 21.175,68.84 21.175,71.82 36.675,71.82 36.675,63.26 21.175,63.26 21.175,66.24 19.675,66.24 19.675,61.74 38.475,61.74 38.475,62.69 67.492,62.69 67.492,-1.312 63.992,-1.312 63.992,9.69 61.402,9.69 61.402,35.607 63.492,35.607 63.492,42.14 57.575,42.14 57.575,42.04 59.375,42.04 59.375,41.14 57.825,41.14 57.825,38.39 ccw(c59.625,38.39) 59.375,36.607 59.375,8.673 58.964,8.673 ccw(c58.963,6.773) 58.962,4.873 58.962,2.89 15.5,2.89 15.5,3.89 13.6,3.89 13.6,4.584 13.5,4.584 13.5,2.475

## Silkscreen, mask and mechanical layers (free items; w line width, h text height)
Top Overlay:
  rectangle: 18.5,13.25 38.5,21.25
  text "+" at 1.25,54.375 h1.5
  text "-" at 1.25,49.95 h1.5
  text "+" at 1.275,34.225 h1.5
  text "-" at 1.3,25.85 h1.5
  text "CERN OHL 1.2" at 41.6,13 h1.8
  text "Betrusted Top FPC" at 18.543,9.67 h2.5
  text "EVT1b" at 18.543,7.77 h1.8
  text "11/19" at 26.1,7.75 h1.8
  text "bunnie" at 34.35,7.75 h1.8
  text "https://github.com/betrusted-io" at 19.5,6 h1.5
Mechanical 1:
  lines w0.2: -15.725,66.775 -15.725,55.475 ; -14.95,-1.025 -15.725,-1.025 -15.725,10.275 ; -14.95,10.275 -15.725,10.275 ; -14.95,21.575 -15.725,21.575 ; -14.95,32.875 -15.725,32.875 ; -14.95,44.175 -15.725,44.175 ; -14.95,55.475 -15.725,55.475 ; -3.075,66.775 6.65,66.775 ; -1.4,65.55 -1.4,66.525 ; -15.725,10.275 -15.725,21.575 ; -15.725,21.575 -15.725,32.875 ; -15.725,32.875 -15.725,44.175 ; -15.725,44.175 -15.725,55.475
  text "11.3mm spacing" at -16.775,72.55 h0.8
Mechanical 2:
  lines w0.1: 65.8,62.125 65.35,61.675 59.375,61.675 59.375,62.69 38.475,62.69 38.475,61.74 19.675,61.74 19.675,66.24 21.175,66.24 21.175,63.26 36.675,63.26 36.675,71.82 21.175,71.82 21.175,68.84 17.75,68.84 17.75,67.94 14,67.94 14,62.69 -1.425,62.69 -1.425,62.225 -9.542,62.225 -9.542,-1.312 -6.042,-1.312 -6.042,9.69 -1.425,9.69 -1.425,8.69 -0.975,8.69 cw(c-0.975,6.79) 0,5.159 0,2.475 0,0.175 ccw(c0.2,0.175) 0.2,-0.025 13.3,-0.025 ccw(c13.3,0.175) 13.5,0.175 13.5,2.475 13.5,4.584 13.6,4.584 13.6,3.89 15.5,3.89 15.5,2.89 58.962,2.89 58.962,4.873 cw(c58.963,6.773) 58.964,8.673 59.375,8.673 59.375,9.69 63.992,9.69 63.992,-1.312 67.492,-1.312 67.492,62.127 65.802,62.127 ; -6,13.25 -6,13.5 -6,31.5 -1.5,31.5 -1.5,13.25 -6,13.25 ; -6,46.25 -1.5,46.25 -1.5,56.75 -6,56.75 -6,46.25 ; -5.542,35.607 -1.425,35.607 -1.425,36.607 ccw(c-1.675,38.39) 0.125,38.39 0.125,41.14 -1.425,41.14 -1.425,42.04 0.375,42.04 0.375,42.14 -5.542,42.14 -5.542,35.607 ; 57.575,42.04 59.375,42.04 59.375,41.14 57.825,41.14 57.825,38.39 ccw(c59.625,38.39) 59.375,36.607 59.375,35.607 63.492,35.607 63.492,42.14 57.575,42.14 57.575,42.04 ; 59.5,13.25 64,13.25 64,31.5 59.5,31.5 59.5,13.5 59.5,13.25 ; 59.5,46.25 59.5,56.775 64,56.775 64,46.25 59.5,46.25
  text "This is the FPC outline layer, please note cut-out regions" at 87,11.75 h1.5
Fab notes:
  lines w0.1: 0,0.175 ccw(c0.2,0.175) 0.2,-0.025 13.3,-0.025 ccw(c13.3,0.175) 13.5,0.175 13.5,2.475 0,2.475 0,0.175
  lines w0.2: 14.25,-0.25 19.75,-5.75 67,-5.75 80.75,8 80.75,31 82.5,32.75
  lines w0.381: 75.06,42.44 85.472,42.44 110.611,42.44 142.606,42.44 159.112,42.44 171.047,42.44 ; 75.06,45.488 85.472,45.488 110.611,45.488 142.606,45.488 159.112,45.488 171.047,45.488 ; 75.06,48.536 85.472,48.536 110.611,48.536 142.606,48.536 159.112,48.536 171.047,48.536 ; 75.06,51.584 85.472,51.584 110.611,51.584 142.606,51.584 159.112,51.584 171.047,51.584 ; 75.06,54.632 85.472,54.632 110.611,54.632 142.606,54.632 159.112,54.632 171.047,54.632 ; 75.06,57.68 85.472,57.68 110.611,57.68 142.606,57.68 159.112,57.68 171.047,57.68 ; 75.06,60.728 85.472,60.728 110.611,60.728 142.606,60.728 159.112,60.728 171.047,60.728 ; 75.06,63.776 85.472,63.776 110.611,63.776 142.606,63.776 159.112,63.776 171.047,63.776 ; 75.06,66.824 171.047,66.824 ; 85.472,69.872 85.472,39.392 ; 110.611,69.872 110.611,39.392 ; 142.606,69.872 142.606,39.392 ; 159.112,69.872 159.112,39.392 ; 85.472,39.392 75.06,39.392 75.06,69.872 171.047,69.872 171.047,39.392 159.112,39.392 ; 85.472,39.392 110.611,39.392 ; 110.611,39.392 142.606,39.392 ; 142.606,39.392 159.112,39.392
  text "This is meant to be the \"standard\" layer stack from KC website at 133um total thickness. The adhesve layers are listed as \"dielectric\"" at 75,72 h1.5
  text "Layer" at 76.838,67.586 h1.52
  text "Name" at 87.25,67.586 h1.52
  text "Material" at 112.389,67.586 h1.52
  text "Thickness" at 144.384,67.586 h1.52
  text "Gerber" at 160.89,67.586 h1.52
  text "Top Overlay" at 87.25,64.538 h1.52
  text "GTO" at 160.89,64.538 h1.52
  text "Top Coverlay" at 87.25,61.49 h1.52
  text "FC-001" at 112.389,61.49 h1.52
  text "0.012mm" at 144.384,61.49 h1.52
  text "GTS" at 160.89,61.49 h1.52
  text "1" at 76.838,58.442 h1.52
  text "Top Layer" at 87.25,58.442 h1.52
  text "Copper" at 112.389,58.442 h1.52
  text "0.020mm" at 144.384,58.442 h1.52
  text "GTL" at 160.89,58.442 h1.52
  text "Dielectric 2" at 87.25,55.394 h1.52
  text "Composite dielectric" at 112.389,55.394 h1.52
  text "0.028mm" at 144.384,55.394 h1.52
  text "Dielectric 1" at 87.25,52.346 h1.52
  text "Composite dielectric" at 112.389,52.346 h1.52
  text "0.012mm" at 144.384,52.346 h1.52
  text "Dielectric 3" at 87.25,49.298 h1.52
  text "Composite dielectric" at 112.389,49.298 h1.52
  text "0.028mm" at 144.384,49.298 h1.52
  text "2" at 76.838,46.25 h1.52
  text "Bottom Layer" at 87.25,46.25 h1.52
  text "Copper" at 112.389,46.25 h1.52
  text "0.020mm" at 144.384,46.25 h1.52
  text "GBL" at 160.89,46.25 h1.52
  text "Bottom Coverlay" at 87.25,43.202 h1.52
  text "FC-001" at 112.389,43.202 h1.52
  text "0.012mm" at 144.384,43.202 h1.52
  text "GBS" at 160.89,43.202 h1.52
  text "Bottom Overlay" at 87.25,40.154 h1.52
  text "GBO" at 160.89,40.154 h1.52
  text "Top side stiffener to 0.3mm total thickness in designated region" at 82.4,33.606 h1.5
  text "Silkscreen: white" at 87.5,29.5 h1.5
  text "Finish: immersion gold" at 87.25,23.5 h1.5
  text "Coverlay: yellow/transparent (typical color)" at 87.25,17.5 h1.5

## Text inside footprints (layer, text, board x,y; h text height)
P1: Fab notes "Stiffener to 0.3mm total thickness" at -0.025,-7.275 h0.8
P2: Top Overlay "+" at 22.325,69.75 h0.8 r270; Top Overlay "-" at 22.35,66.075 h0.8 r270